# EAGLE board Central Board (EAGLE 8.4.1), part 1 of 2
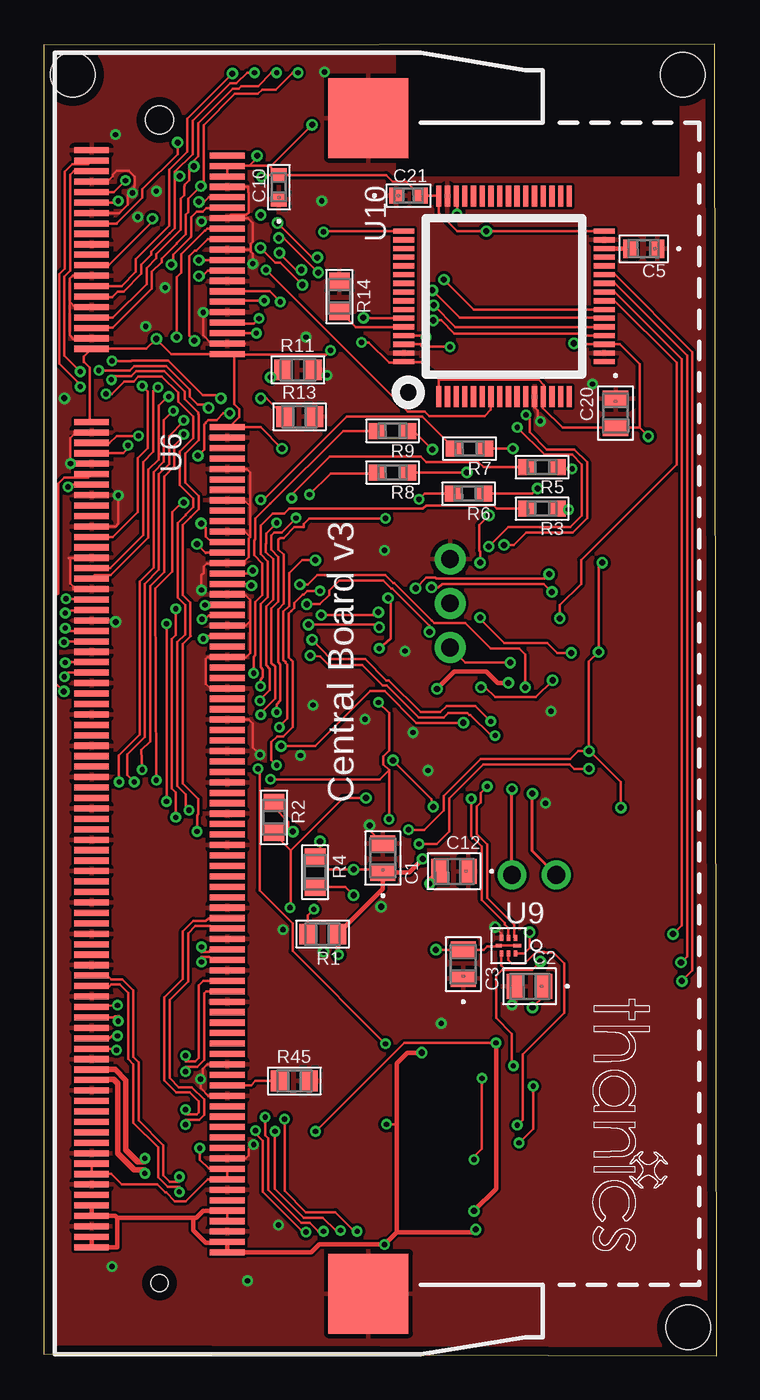
[diagram p0: board, top side]
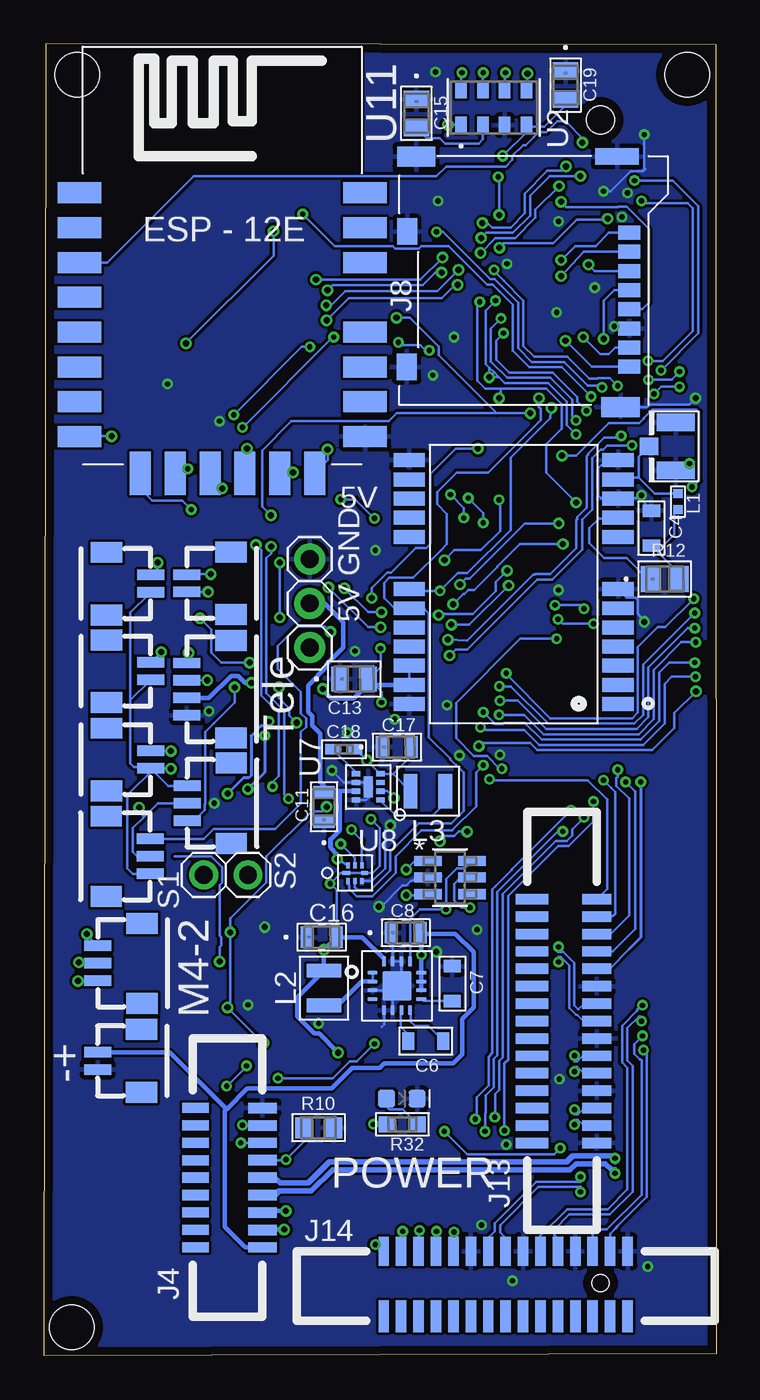
[diagram p1: board, bottom side, seen from below]

Size 38.63 x 75.39 mm. Coordinates in mm from the lower left corner, seen from the top.
Outline: 0,0.13 38.63,0 38.51,75.39 0.03,75.31 0,0.13
Copper layers (1*16): Top 0.035mm / dielectric 1.6mm / Bottom 0.035mm
Design rules "Elecrow_2-layer_PCB_eagle_rule *": minimum track width 6mil, minimum drill 12mil, track to track 6mil, track to pad 6mil, pad to pad 6mil, via to via 8mil, smd to smd 0mil, copper to edge 20mil, drill to drill 10mil, minimum pad ring 6mil, minimum via ring 6mil, stop-mask expansion 0mil, vias tented up to drill 100mil, thermal gap 10mil
Holes 2.54 mm at 37.01,1.65 1.68,73.58 36.7,73.58

## Footprints (pad centres in the part's own frame; a part is rotated, then mirrored left to right if it is on the bottom)
0805 = smd 0.965 x 1.448: 1 -0.826,0; 2 0.826,0
0603_CAPACITOR = smd 0.701 x 1.001: 1 -1.001,0; 2 1.001,0
0603-M = smd 0.813 x 1.067: 1 -0.775,0; 2 0.775,0
G-21 = smd 0.711 x 1.245: 1 -0.851,0; 2 0.851,0
G-188-M = smd 0.813 x 0.914: 1 -0.699,0; 2 0.699,0
YAG_CC0805 = smd 0.965 x 1.448: 1 -0.826,0; 2 0.826,0
CC0402N-M = smd 0.864 x 0.61: 1 -0.635,0; 2 0.635,0
LED-0603 = smd 1 x 1: A -0.877,0; C 0.877,0
JST_SH_2POS = smd 0.6 x 1.55: 1 -1.5,0; 2 -0.5,0 | smd 1.2 x 1.8: P$5 -2.8,2.525; P$6 0.8,2.525
JST_SH_4POS = smd 0.6 x 1.55: 1 -1.5,0; 2 -0.5,0; 3 0.5,0; 4 1.5,0 | smd 1.2 x 1.8: P$5 -2.8,2.525; P$6 2.8,2.525
9POS_FFC_CONNECTOR = smd 0.6 x 1.65: 1 -7.27,-2; 2 -6.27,-2; 3 -5.27,-2; 4 -4.27,-2; 5 -3.27,-2; 6 -2.27,-2; 7 -1.27,-2; 8 -0.27,-2; 9 0.73,-2 | smd 0.584 x 1.524: P$16 -7.27,1.852; P$17 -6.27,1.852; P$18 -5.27,1.852; P$19 -4.27,1.852; P$20 -3.27,1.852; P$21 -2.27,1.852; P$22 -1.27,1.852; P$23 -0.27,1.852; P$24 0.73,1.852
U.FL = smd 2.2 x 1: P$1 0,1.375; P$2 0,-1.375 | smd 1.05 x 1: P$3 1.525,0
MICROSD = smd 0.8 x 1.24: 1 -4.4,0; 2 -3.3,0; 3 -2.2,0; 4 -1.1,0; 5 0,0; 6 1.1,0; 7 2.2,0; 8 3.3,0 | smd 0.95 x 2.5: 9 -8.775,-0.7 | smd 1.15 x 2.2: 10 5.615,-0.5; 11 -8.775,-12.23 | smd 1.5 x 1.15: 12 -4.47,-12.755; 13 3.31,-12.775
JST_SH_3POS = smd 0.6 x 1.55: 1 -1.61,-0.08; 2 -0.61,-0.08; 3 0.39,-0.08 | smd 1.2 x 1.8: P$5 -2.91,2.445; P$6 1.69,2.445
15POS_FFC_CONNECTOR = smd 0.6 x 1.65: 1 -6,-2; 2 -5,-2; 3 -4,-2; 4 -3,-2; 5 -2,-2; 6 -1,-2; 7 0,-2; 8 1,-2; 9 2,-2; 10 3,-2; 11 4,-2; 12 5,-2; 13 6,-2; 14 7,-2; 15 8,-2 | smd 0.6 x 1.85: P$16 -6,1.725; P$17 -5,1.725; P$18 -4,1.725; P$19 -3,1.725; P$20 -2,1.725; P$21 -1,1.725; P$22 0,1.725; P$23 1,1.725; P$24 2,1.725; P$25 3,1.725; P$26 4,1.725; P$27 5,1.725; P$28 6,1.725; P$29 7,1.725; P$30 8,1.725
1X02 = drill 1.016 pad 1.651: 1 -1.27,0; 2 1.27,0
1X03 = drill 1.016 pad 1.778: 1 -2.54,0; 2 0,0; 3 2.54,0
0402_INDUCTOR = smd 0.525 x 0.55: P$1 -0.463,0; P$2 0.463,0
1008_INDUCTOR = smd 0.8 x 2: P$1 -1,0; P$2 1,0
RC0805N = smd 1.006 x 1.2: 1 -0.853,0; 2 0.853,0
RC0603N-M = smd 0.965 x 0.914: 1 -0.876,0; 2 0.876,0
STA_RNCP0805-M = smd 1.118 x 1.499: 1 -0.826,0; 2 0.826,0
LGA8-M = smd 0.94 x 0.66: 1 -1.003,1.875; 2 -1.003,0.625; 3 -1.003,-0.625; 4 -1.003,-1.875; 5 1.003,-1.875; 6 1.003,-0.625; 7 1.003,0.625; 8 1.003,1.875
MF06A-M = smd 1.575 x 0.584: 1 -1.27,0.953; 2 -1.27,0; 3 -1.27,-0.953; 4 1.27,-0.953; 5 1.27,0; 6 1.27,0.953
NEO-M8 = smd 1.8 x 0.8: 1 6.4,-7.4; 2 6.4,-6.3; 3 6.4,-5.2; 4 6.4,-4.1; 5 6.4,-3; 6 6.4,-1.9; 7 6.4,-0.8; 8 6.4,2.2; 9 6.4,3.3; 10 6.4,4.4; 11 6.4,5.5; 12 6.4,6.6; 13 -5.6,6.6; 14 -5.6,5.5; 15 -5.6,4.4; 16 -5.6,3.3; 17 -5.6,2.2; 18 -5.6,-0.8; 19 -5.6,-1.9; 20 -5.6,-3; 21 -5.6,-4.1; 22 -5.6,-5.2; 23 -5.6,-6.3; 24 -5.6,-7.4
VQFN16 = smd 0.6 x 0.24: 1 -1.4,0.75; 2 -1.4,0.25; 3 -1.4,-0.25; 4 -1.4,-0.75; 9 1.4,-0.75; 10 1.4,-0.25; 11 1.4,0.25; 12 1.4,0.75 | smd 0.24 x 0.6: 5 -0.75,-1.4; 6 -0.25,-1.4; 7 0.25,-1.4; 8 0.75,-1.4; 13 0.75,1.4; 14 0.25,1.4; 15 -0.25,1.4; 16 -0.75,1.4 | smd 1.68 x 1.68: 17 0,0
SO-DIMM = smd 0.35 x 2: 1 -26.4,-3.9; 2 -26.1,3.9; 3 -25.8,-3.9; 4 -25.5,3.9; 5 -25.2,-3.9; 6 -24.9,3.9; 7 -24.6,-3.9; 8 -24.3,3.9; 9 -24,-3.9; 10 -23.7,3.9; 11 -23.4,-3.9; 12 -23.1,3.9; 13 -22.8,-3.9; 14 -22.5,3.9; 15 -22.2,-3.9; 16 -21.9,3.9; 17 -21.6,-3.9; 18 -21.3,3.9; 19 -21,-3.9; 20 -20.7,3.9; 21 -20.4,-3.9; 22 -20.1,3.9; 23 -19.8,-3.9; 24 -19.5,3.9; 25 -19.2,-3.9; 26 -18.9,3.9; 27 -18.6,-3.9; 28 -18.3,3.9; 29 -18,-3.9; 30 -17.7,3.9; 31 -17.4,-3.9; 32 -17.1,3.9; 33 -16.8,-3.9; 34 -16.5,3.9; 35 -16.2,-3.9; 36 -15.9,3.9; 37 -15.6,-3.9; 38 -15.3,3.9; 39 -15,-3.9; 40 -14.7,3.9; 41 -10.8,-3.9; 42 -10.5,3.9; 43 -10.2,-3.9; 44 -9.9,3.9; 45 -9.6,-3.9; 46 -9.3,3.9; 47 -9,-3.9; 48 -8.7,3.9; 49 -8.4,-3.9; 50 -8.1,3.9; 51 -7.8,-3.9; 52 -7.5,3.9; 53 -7.2,-3.9; 54 -6.9,3.9; 55 -6.6,-3.9; 56 -6.3,3.9; 57 -6,-3.9; 58 -5.7,3.9; 59 -5.4,-3.9; 60 -5.1,3.9; 61 -4.8,-3.9; 62 -4.5,3.9; 63 -4.2,-3.9; 64 -3.9,3.9; 65 -3.6,-3.9; 66 -3.3,3.9; 67 -3,-3.9; 68 -2.7,3.9; 69 -2.4,-3.9; 70 -2.1,3.9; 71 -1.8,-3.9; 72 -1.5,3.9; 73 -1.2,-3.9; 74 -0.9,3.9; 75 -0.6,-3.9; 76 -0.3,3.9; 77 0,-3.9; 78 0.3,3.9; 79 0.6,-3.9; 80 0.9,3.9; 81 1.2,-3.9; 82 1.5,3.9; 83 1.8,-3.9; 84 2.1,3.9; 85 2.4,-3.9; 86 2.7,3.9; 87 3,-3.9; 88 3.3,3.9; 89 3.6,-3.9; 90 3.9,3.9; 91 4.2,-3.9; 92 4.5,3.9; 93 4.8,-3.9; 94 5.1,3.9; 95 5.4,-3.9; 96 5.7,3.9; 97 6,-3.9; 98 6.3,3.9; 99 6.6,-3.9; 100 6.9,3.9; 101 7.2,-3.9; 102 7.5,3.9; 103 7.8,-3.9; 104 8.1,3.9; 105 8.4,-3.9; 106 8.7,3.9; 107 9,-3.9; 108 9.3,3.9; 109 9.6,-3.9; 110 9.9,3.9; 111 10.2,-3.9; 112 10.5,3.9; 113 10.8,-3.9; 114 11.1,3.9; 115 11.4,-3.9; 116 11.7,3.9; 117 12,-3.9; 118 12.3,3.9; 119 12.6,-3.9; 120 12.9,3.9; 121 13.2,-3.9; 122 13.5,3.9; 123 13.8,-3.9; 124 14.1,3.9; 125 14.4,-3.9; 126 14.7,3.9; 127 15,-3.9; 128 15.3,3.9; 129 15.6,-3.9; 130 15.9,3.9; 131 16.2,-3.9; 132 16.5,3.9; 133 16.8,-3.9; 134 17.1,3.9; 135 17.4,-3.9; 136 17.7,3.9; 137 18,-3.9; 138 18.3,3.9; 139 18.6,-3.9; 140 18.9,3.9; 141 19.2,-3.9; 142 19.5,3.9; 143 19.8,-3.9; 144 20.1,3.9; 145 20.4,-3.9; 146 20.7,3.9; 147 21,-3.9; 148 21.3,3.9; 149 21.6,-3.9; 150 21.9,3.9; 151 22.2,-3.9; 152 22.5,3.9; 153 22.8,-3.9; 154 23.1,3.9; 155 23.4,-3.9; 156 23.7,3.9; 157 24,-3.9; 158 24.3,3.9; 159 24.6,-3.9; 160 24.9,3.9; 161 25.2,-3.9; 162 25.5,3.9; 163 25.8,-3.9; 164 26.1,3.9; 165 26.4,-3.9; 166 26.7,3.9; 167 27,-3.9; 168 27.3,3.9; 169 27.6,-3.9; 170 27.9,3.9; 171 28.2,-3.9; 172 28.5,3.9; 173 28.8,-3.9; 174 29.1,3.9; 175 29.4,-3.9; 176 29.7,3.9; 177 30,-3.9; 178 30.3,3.9; 179 30.6,-3.9; 180 30.9,3.9; 181 31.2,-3.9; 182 31.5,3.9; 183 31.8,-3.9; 184 32.1,3.9; 185 32.4,-3.9; 186 32.7,3.9; 187 33,-3.9; 188 33.3,3.9; 189 33.6,-3.9; 190 33.9,3.9; 191 34.2,-3.9; 192 34.5,3.9; 193 34.8,-3.9; 194 35.1,3.9; 195 35.4,-3.9; 196 35.7,3.9; 197 36,-3.9; 198 36.3,3.9; 199 36.6,-3.9; 200 36.9,3.9 | smd 4.6 x 4.6: G1 -28.254,12; G2 39.27,12 | hole 1.6: -28.15,0 | hole 0.965: 38.65,0
MLF(ML)_8PIN = smd 0.5 x 0.3: 1 -0.7,0.75; 2 -0.7,0.25; 3 -0.7,-0.25; 4 -0.7,-0.75; 5 0.7,-0.75; 6 0.7,-0.25; 7 0.7,0.25; 8 0.7,0.75 | smd 0.5 x 1.2: EP 0,0
8-UMLP = smd 0.45 x 0.22: 1 -0.5,0 | smd 0.22 x 0.35: 2 -0.4,-0.45; 3 0,-0.45; 4 0.4,-0.45; 6 0.4,0.45; 7 0,0.45; 8 -0.4,0.45 | smd 0.35 x 0.22: 5 0.55,0
LQFP64 = smd 1.2 x 0.3: 1 -5.75,3.75; 2 -5.75,3.25; 3 -5.75,2.75; 4 -5.75,2.25; 5 -5.75,1.75; 6 -5.75,1.25; 7 -5.75,0.75; 8 -5.75,0.25; 9 -5.75,-0.25; 10 -5.75,-0.75; 11 -5.75,-1.25; 12 -5.75,-1.75; 13 -5.75,-2.25; 14 -5.75,-2.75; 15 -5.75,-3.25; 16 -5.75,-3.75; 33 5.75,-3.75; 34 5.75,-3.25; 35 5.75,-2.75; 36 5.75,-2.25; 37 5.75,-1.75; 38 5.75,-1.25; 39 5.75,-0.75; 40 5.75,-0.25; 41 5.75,0.25; 42 5.75,0.75; 43 5.75,1.25; 44 5.75,1.75; 45 5.75,2.25; 46 5.75,2.75; 47 5.75,3.25; 48 5.75,3.75 | smd 0.3 x 1.2: 17 -3.75,-5.75; 18 -3.25,-5.75; 19 -2.75,-5.75; 20 -2.25,-5.75; 21 -1.75,-5.75; 22 -1.25,-5.75; 23 -0.75,-5.75; 24 -0.25,-5.75; 25 0.25,-5.75; 26 0.75,-5.75; 27 1.25,-5.75; 28 1.75,-5.75; 29 2.25,-5.75; 30 2.75,-5.75; 31 3.25,-5.75; 32 3.75,-5.75; 49 3.75,5.75; 50 3.25,5.75; 51 2.75,5.75; 52 2.25,5.75; 53 1.75,5.75; 54 1.25,5.75; 55 0.75,5.75; 56 0.25,5.75; 57 -0.25,5.75; 58 -0.75,5.75; 59 -1.25,5.75; 60 -1.75,5.75; 61 -2.25,5.75; 62 -2.75,5.75; 63 -3.25,5.75; 64 -3.75,5.75
ESP12E-SMD = smd 2.5 x 1.2: ADC -8.3,3.8; CH_PD -8.3,1.8; GND 8.1,-8.2; GPIO0 8.1,-2.2; GPIO2 8.1,-4.2; GPIO5 8.1,1.8; GPIO12 -8.3,-4.2; GPIO13 -8.3,-6.2; GPIO14 -8.3,-2.2; GPIO15 8.1,-6.2; GPIO16 -8.3,-0.2; RESET -8.3,5.8; RXD0 8.1,3.8; TXD0 8.1,5.8; VCC -8.3,-8.2 | smd 1.2 x 2.5: CS0 -4.8,-10.3; GPIO9 -0.8,-10.3; GPIO10 1.2,-10.3; MISO -2.8,-10.3; MOSI 3.2,-10.3; SCLK 5.2,-10.3

## Placement (x,y rotation side)
C1  0.1uF  [0805]  19.48,28.6 90 top
C2  0.1uF  [0805]  27.91,21.23 180 top
C3  0.1uF  [0805]  24.1,22.5 90 top
C4  10nF  [0603_CAPACITOR]  3.73,47.55 270 bottom
C5  4.7uF  [0603-M]  34.47,63.6 180 top
C6  10nF  [0603_CAPACITOR]  16.69,18.08 180 bottom
C7  10nF  [0603_CAPACITOR]  15.16,21.39 270 bottom
C8  10uF  [G-21]  17.83,24.31 0 bottom
C10  2.2uF  [G-188-M]  13.51,67.13 90 top
C11  10uF  [G-21]  22.53,31.55 90 bottom
C12  0.1uF  [0805]  23.57,27.84 180 top
C13  0.1uF  [0805]  20.8,38.89 0 bottom
C15  1uF  [YAG_CC0805]  17.22,71.37 270 bottom
C16  22uF  [G-21]  22.66,24.05 0 bottom
C17  10uF  [G-21]  18.34,34.98 0 bottom
C18  560pF  [CC0402N-M]  21.39,34.85 0 bottom
C19  1uF  [YAG_CC0805]  8.66,73 270 bottom
C20  0.1uF  [0805]  32.84,54.15 270 top
C21  2.2uF  [G-188-M]  20.95,66.65 0 top
D1  GREEN  [LED-0603]  18.06,14.78 0 bottom
J1  [JST_SH_2POS]  32.49,45.36 90 bottom
J2  [JST_SH_2POS]  32.49,40.34 90 bottom
J3  [JST_SH_4POS]  30.4,38.3 270 bottom
J4  [9POS_FFC_CONNECTOR]  28.07,13.51 90 bottom
J5  U.FL  [U.FL]  2.34,52.25 180 bottom
J6  [JST_SH_2POS]  35.53,15.95 270 bottom
J7  [JST_SH_2POS]  32.49,35.26 90 bottom
J8  MICROSD  [MICROSD]  5,60.12 270 bottom
J9  [JST_SH_2POS]  30.4,43.38 270 bottom
J10  [JST_SH_3POS]  30.3,31.14 270 bottom
J11  [JST_SH_3POS]  32.59,29.31 90 bottom
J12  [JST_SH_3POS]  35.43,21.95 270 bottom
J13  [15POS_FFC_CONNECTOR]  8.86,18.24 90 bottom
J14  [15POS_FFC_CONNECTOR]  11.1,4.01 180 bottom
JP1  [1X02]  28.17,27.64 0 bottom
JP2  [1X03]  23.34,43.23 90 bottom
L1  27 nH  [0402_INDUCTOR]  2.21,49.07 270 bottom
L2  470nH  [1008_INDUCTOR]  22.53,21.13 90 bottom
L3  470nH  [1008_INDUCTOR]  16.56,32.44 180 bottom
R1  10k  [RC0805N]  16.03,24.23 180 top
R2  10k  [RC0805N]  13.23,30.94 270 top
R3  20R  [RC0603N-M]  28.63,48.67 180 top
R4  10k  [RC0805N]  15.6,27.79 270 top
R5  20R  [RC0603N-M]  28.63,51.05 180 top
R6  20R  [RC0603N-M]  24.41,49.53 180 top
R7  20R  [RC0603N-M]  24.46,52.12 180 top
R8  20R  [RC0603N-M]  20.04,50.75 180 top
R9  20R  [RC0603N-M]  20.04,53.14 180 top
R10  10k  [RC0805N]  22.83,13.11 0 bottom
R11  10k  [RC0805N]  14.61,56.64 0 top
R12  10  [STA_RNCP0805-M]  2.97,44.63 0 bottom
R13  10k  [RC0805N]  14.71,53.95 0 top
R14  10k  [RC0805N]  16.99,60.86 270 top
R32  20R  [RC0603N-M]  18.03,13.31 180 bottom
R45  10k  [RC0805N]  14.4,15.8 0 top
U2  [LGA8-M]  12.78,71.7 90 bottom
U3  LM3880MF-1AA/NOPBMF06A-M  [MF06A-M]  15.29,27.48 0 bottom
U4  NEO-M8  [NEO-M8]  12.04,44.85 0 bottom
U5  TPS6209  [VQFN16]  18.34,21.26 0 bottom
U6  [SO-DIMM]  6.65,42.85 270 top
U7  MIC23050  [MLF(ML)_8PIN]  19.99,32.69 180 bottom
U8  [8-UMLP]  20.75,27.74 0 bottom
U9  [8-UMLP]  26.7,23.57 180 top
U10  [LQFP64]  26.44,60.86 90 top
U11  [ESP12E-SMD]  28.27,61.01 0 bottom

## Library data of the parts
C1-C3 C12 C13 C20 = 0.1uF X7R Ceramic Capacitor; COPYRIGHT: Copyright C 2015 Accelerated Designs. All rights reserved; MANUFACTURER_PART_NUMBER: 08055C104KAT2A; VENDOR: Vendor
C4 C6 C7 J1-J4 J6-J14 L1-L3 U5 U7-U10 = thanics_robotics
C5 = 4.7uF-capacitor; MANUFACTURER_PART_NUMBER: 06036D475KAT2A; VENDOR: AVX Corporation
C8 C11 C17 = 10uF X5R Ceramic Capacitor; COPYRIGHT: Copyright C 2015 Accelerated Designs. All rights reserved; MANUFACTURER_PART_NUMBER: GRM21BR60J106ME19L; VENDOR: Vendor
C10 C21 = 2.2uF X5R Capacitor; COPYRIGHT: Copyright C 2015 Accelerated Designs. All rights reserved; MANUFACTURER_PART_NUMBER: GRM188R61C225KE15J; VENDOR: Vendor
C15 C19 = 1uF X7R Ceramic Capacitor; COPYRIGHT: Copyright C 2015 Accelerated Designs. All rights reserved; MANUFACTURER_PART_NUMBER: CC0805KKX7R7BB105; VENDOR: Vendor
C16 = 22uF X5R Ceramic Capacitor; COPYRIGHT: Copyright C 2015 Accelerated Designs. All rights reserved; MANUFACTURER_PART_NUMBER: GRM21BR60J226ME39L; VENDOR: Vendor
C18 = 560pF-capacitor; MANUFACTURER_PART_NUMBER: CC0402KRX7R9BB561; VENDOR: Yageo
D1 = SparkFun-LED; PROD_ID: DIO-00821
J5 = SparkFun-Connectors; PROD_ID: CONN-09193; SF_ID: WRL-09144
JP1 JP2 = pinhead
R1 R2 R4 R10 R11 R13 R14 R45 = 10k-resistor; CASE: 0805 2012 metric; COMPOSITION: Thin Film; COPYRIGHT: Copyright C 2015 Accelerated Designs. All rights reserved; DATASHEET: httpindustrial.panasonic.comwwwcgijvcr13pz.cgi?E+PZ+3+AOA0026+ERA6AEB103V+7+WW; DIGIKEYPARTNUMBER: P10KDATRND; HEIGHT: 0.024" 0.60mm; LEADSTYLE: Surface Mount SMD SMT; MANUFACTURER_PART_NUMBER: ERA6AEB103V; NUMBEROFTERMINATIONS: 2; PACKAGECASE: 0805 2012 Metric; PACKAGING: Tape &amp Reel TR; POWERWATTS: 0.125W 18W; QUANTITY_AVAILABLE: 225000; RESISTANCEINOHMS: 10.0K; RESISTANCEOHMS: 10K; SIZEDIMENSION: 0.079" L x 0.049" W 2.00mm x 1.25mm; TEMPERATURECOEFFICIENT: 25ppm°C; TOLERANCE: 0.1%; VENDOR: Panasonic; VOLTAGEWORKING: 100V
R3 R5-R9 R32 = 20-resistor; MANUFACTURER_PART_NUMBER: RC0603JR0720RL; VENDOR: Yageo
R12 = 10-resistor; COPYRIGHT: Copyright C 2015 Accelerated Designs. All rights reserved; MANUFACTURER_PART_NUMBER: RNCP0805FTD10R0; VENDOR: Vendor
U2 = mpl115a1-barometer; MANUFACTURER_PART_NUMBER: mpl115a1; VENDOR: Freescale
U3 = LM3880MF; MANUFACTURER_PART_NUMBER: lm3880mf1aaNOPB; VENDOR: National Semiconductor
U4 = ubloxLib
U6 = raspberrypi_cm
U11 = esp8266modules

## Nets
1.8V: C2.1 C17.2 C18.2 J4.3 L3.P$2 U6.183 U6.184 U6.185 U6.186 U7.4 U9.8
+3V3: C3.2 C10.2 C12.2 C13.2 C16.2 C19.2 C20.2 C21.2 J3.3 J4.2 J8.4 J13.15 J14.15 L2.P$2 R32.2 U2.1 U2.4 U4.22 U4.23 U5.16 U6.4 U6.6 U6.39 U6.40 U6.41 U6.42 U6.191 U6.192 U6.193 U6.194 U6.197 U6.198 U6.199 U6.200 U8.1 U8.5 U9.1 U9.5 U10.1 U10.13 U10.19 U10.32 U10.48 U10.64 U11.VCC
+5V: C1.1 C8.2 C11.2 J4.1 J6.1 JP2.2 R1.1 R2.1 R4.1 U3.1 U5.10 U5.11 U5.12 U7.7 U8.8
C0_C_N: J13.8 U6.144
C0_C_P: J13.9 U6.142
C0_D0_N: J13.2 U6.138
C0_D0_P: J13.3 U6.136
C0_D1_N: J13.5 U6.150
C0_D1_P: J13.6 U6.148
C0_IO0: J13.11 U6.36
C0_IO1: J13.12 U6.34
C1_C_N: J14.8 U6.149
C1_C_P: J14.9 U6.147
C1_D0_N: J14.2 U6.161
C1_D0_P: J14.3 U6.159
C1_D1_N: J14.5 U6.155
C1_D1_P: J14.6 U6.153
C1_IO0: J14.11 U6.78
C1_IO1: J14.12 U6.76
EMMC_DISABLE_N: U6.2
GND: C1.2 C2.2 C3.1 C4.1 C5.1 C7.1 C8.1 C10.1 C11.1 C12.1 C13.1 C15.1 C16.1 C17.1 C19.1 C20.1 C21.1 D1.C J3.4 J4.9 J5.P$1 J5.P$2 J6.2 J8.6 J8.9 J8.10 J8.11 J8.12 J8.13 J13.1 J13.4 J13.7 J13.10 J14.1 J14.4 J14.7 J14.10 JP2.3 R10.2 R11.2 R13.2 R14.1 R45.2 U2.3 U3.2 U4.7 U4.10 U4.12 U4.13 U4.24 U5.3 U5.5 U5.6 U5.14 U5.15 U5.17 U6.1 U6.7 U6.8 U6.13 U6.14 U6.19 U6.20 U6.25 U6.26 U6.31 U6.32 U6.37 U6.38 U6.43 U6.44 U6.49 U6.50 U6.55 U6.56 U6.61 U6.62 U6.67 U6.68 U6.73 U6.74 U6.79 U6.80 U6.85 U6.86 U6.91 U6.92 U6.97 U6.98 U6.103 U6.104 U6.109 U6.110 U6.115 U6.116 U6.121 U6.122 U6.127 U6.133 U6.134 U6.139 U6.140 U6.145 U6.146 U6.151 U6.152 U6.157 U6.163 U6.164 U6.169 U6.170 U6.181 U6.182 U6.187 U6.188 U6.195 U6.196 U6.G1 U6.G2 U7.6 U7.8 U7.EP U8.4 U9.4 U10.12 U10.18 U10.31 U10.47 U10.63 U11.GND
GPCLK1: J4.6 R10.1 U6.82
I2C_MPU_SCL: U9.3 U10.61
I2C_MPU_SDA: U9.2 U10.62
I2C_SCL: U4.19 U6.11 U8.3
I2C_SCL_1V8: J4.7 U9.6
I2C_SCL_5V: J1.2 J2.2 J7.2 J10.2 J11.2 U8.6
I2C_SDA: U4.18 U6.9 U8.2
I2C_SDA_1V8: J4.8 U9.7
I2C_SDA_5V: J1.1 J2.1 J7.1 J10.1 J11.1 U8.7
ID_SD: U6.15 U11.CH_PD
INT_A: J10.3 U6.64
INT_B: J11.3 U6.66
MOTOR1: JP2.1 U10.24
MOTOR2: J12.1 U10.25
MOTOR3: J12.2 U10.26
MOTOR4: J12.3 U10.27
N$1: J5.P$3 L1.P$1 U4.11
N$2: C6.2 U5.7
N$3: C6.1 U5.8
N$4: D1.A R32.1
N$5: R1.2 U3.6 U5.13
N$6: R2.2 U3.5 U7.2
N$7: R3.1 U11.CS0
N$8: R5.1 U11.MISO
N$9: R6.1 U11.GPIO9
N$10: R7.1 U11.GPIO10
N$11: C5.2 U10.30
N$12: C15.2 U2.2
N$13: R12.1 U4.9
N$14: R8.1 U11.MOSI
N$15: R9.1 U11.SCLK
N$16: R14.2 U10.60
N$26: C4.2 L1.P$2 R12.2
N$29: C7.2 U5.9
N$30: L2.P$1 U5.1 U5.2
N$32: L3.P$1 U7.1
N$48: C18.1 U7.5
N$53: R45.1 U6.168
NRST: U6.63 U10.7
POWER_SEQ_EN: R4.2 U3.3
SCL0: J13.13 R11.1 U6.30
SCL1: J14.13 U6.5
SD_CLK: R9.2 U6.75
SD_CMD: R3.2 U6.77
SD_D0: R5.2 U6.81
SD_D1: R8.2 U6.83
SD_D2: R6.2 U6.87
SD_D3: R7.2 U6.89
SDA0: J13.14 R13.1 U6.28
SDA1: J14.14 U6.3
SDX_CLK: J8.5 U6.10
SDX_CMD: J8.3 U6.12
SDX_D0: J8.7 U6.16
SDX_D1: J8.8 U6.18
SDX_D2: J8.1 U6.22
SDX_D3: J8.2 U6.24
SERVO1: JP1.1 U6.45
SERVO2: JP1.2 U6.47
SPI_CS0: U2.5 U6.27
SPI_CS1: U6.23 U10.20
SPI_MISO: U2.6 U6.29 U10.22
SPI_MOSI: U2.7 U6.33 U10.23
SPI_SCLK: U2.8 U6.35 U10.21
SWCLK: U6.69 U10.49
SWDIO: U6.71 U10.46
UART2_RX: J9.2 U6.72
UART2_TX: J9.1 U6.70
USART1_RX: J3.1 U6.53 U10.59
USART1_TX: J3.2 U6.51
USB_D_N: J4.4 U6.167
USB_D_P: J4.5 U6.165